# Altium PCB S28A模块化小车底板.pcbdoc (part 2 of 2)
Units mil, origin at the board's own origin, x right, y up, seen from the top; angles counter-clockwise.
Board outline 5579.41 x 4352.55 mil, 2 copper layers (Top Layer, Bottom Layer); 38 components, 47 nets, 158 pads, 338 vias.
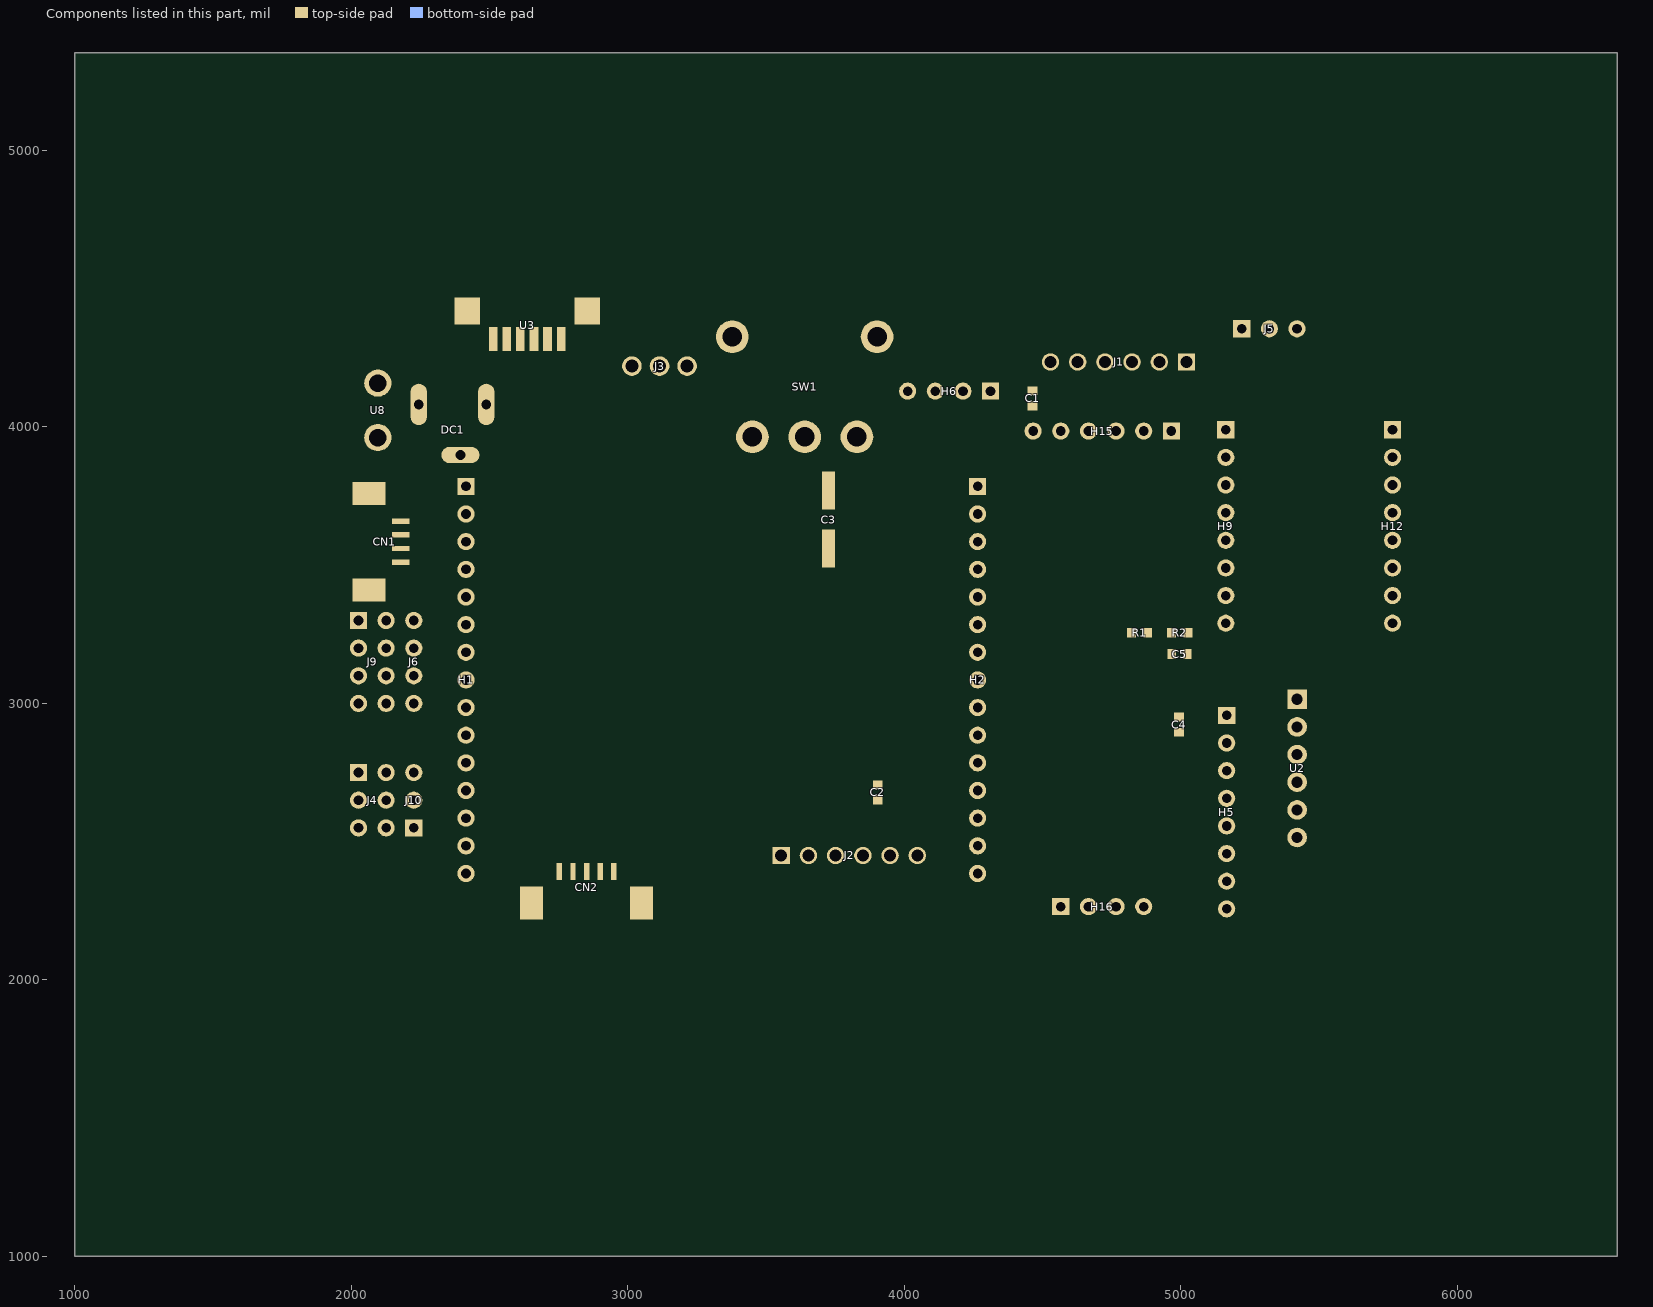
[diagram p2: the components of this part, seen from the top]

## Silkscreen, mask and mechanical layers (free items; w line width, h text height)
Top Overlay:
  lines w10 net PA6: 4026.54,2778.93 4096.54,2708.93 4161.54,2708.93 4181.54,2688.93 4181.54,2573.93 4196.54,2558.93
  lines w10 net S$112028: 2556.54,4162.55 2556.54,4258.93
  lines w10 net S$113267: 2511.54,4262.55 2781.54,4262.55
  lines w10 net S$14509: 5226.54,4028.93 5376.14,4028.93 ; 5376.54,4023.93 ccw(c5447.61,4008.7) 5519.21,4021.18 ; 5521.54,4028.93 5705.54,4028.93
  lines w10 net S$14513: 5226.54,3233.53 5226.54,4028.93 ; 5226.54,3238.93 5226.54,3233.93 5706.54,3233.93 5706.54,4030.53
  lines w10 net S$157343: 4026.54,2778.93 4026.54,2933.93
  lines w10 net S$232476: 2556.54,4162.55 2591.54,4127.55 2886.54,4127.55
  text "ON" at 3346.54,4402.12 h70.87
  text "OFF" at 3761.54,4402.12 h70.87
  text "PA24" at 4170.79,4362.55 h47.24 r270
  text "GND" at 3965.79,4314.05 h47.24 r270
  text "PA9" at 4070.79,4314.05 h47.24 r270
  text "5V" at 4270.79,4271.95 h47.24 r270
  text "GND" at 5139.41,4218.93 h47.24
  text "5V" at 5284.41,4218.93 h47.24
  text "PA8" at 5381.54,4218.93 h47.24
  text "AO2" at 4487.92,4187.55 h47.24 r270
  text "GND" at 4872.92,4182.55 h47.24 r270
  text "3V3" at 4577.92,4177.55 h47.24 r270
  text "A26" at 4682.92,4177.55 h47.24 r270
  text "A25" at 4782.92,4177.55 h47.24 r270
  text "AO1" at 4972.92,4177.55 h47.24 r270
  text "GND" at 2977.92,4167.55 h47.24 r270
  text "3V3" at 3077.92,4167.55 h47.24 r270
  text "PA22" at 3172.92,4157.55 h47.24 r270
  text "+" at 2346.34,4138.73 h98.42 r135
  text "3V3" at 2776.85,4112.55 h39.37 r270
  text "GND" at 2826.85,4112.55 h39.37 r270
  text "PB17" at 2566.85,4107.55 h39.37 r270
  text "PB16" at 2621.85,4107.55 h39.37 r270
  text "PA12" at 2676.85,4107.55 h39.37 r270
  text "PA27" at 2726.85,4107.55 h39.37 r270
  text "-" at 2360.75,3943.93 h98.42 r90
  text "PB2" at 5570.82,3942.55 h47.24
  text "VM" at 5246.54,3935.31 h47.24
  text "12V" at 4422.92,3923.93 h47.24 r270
  text "12V" at 4522.92,3923.93 h47.24 r270
  text "12V" at 4617.92,3923.93 h47.24 r270
  text "GND" at 4717.92,3918.93 h47.24 r270
  text "GND" at 4817.92,3918.93 h47.24 r270
  text "GND" at 4917.92,3918.93 h47.24 r270
  text "PA13" at 5541.62,3838.93 h47.24
  text "VCC" at 5241.54,3830.31 h47.24
  text "3V3" at 4095.81,3747.86 h39.37
  text "5V" at 2496.54,3744.24 h39.37
  text "GND" at 5241.54,3735.31 h47.24
  text "PA14" at 5539.41,3733.93 h47.24
  text "GND" at 4097.61,3647.86 h39.37
  text "GND" at 2481.54,3644.24 h39.37
  text "5V" at 5610.72,3638.93 h47.24
  text "AO1" at 5241.54,3635.31 h47.24
  text "NC" at 2226.54,3628.18 h31.5
  text "GND" at 2226.54,3573.18 h31.5
  text "PA7" at 4095.81,3547.86 h39.37
  text "PA25" at 2481.54,3544.24 h39.37
  text "PA16" at 5543.72,3543.93 h47.24
  text "AO2" at 5241.54,3535.31 h47.24
  text "A24" at 2226.54,3528.18 h31.5
  text "5V" at 2226.54,3478.18 h31.5
  text "PB2" at 4099.41,3442.86 h39.37
  text "BO2" at 5246.54,3440.31 h47.24
  text "PA26" at 2481.54,3439.24 h39.37
  text "PA17" at 5541.62,3438.93 h47.24
  text "PB3" at 5570.81,3343.93 h47.24
  text "PB3" at 4099.41,3342.86 h39.37
  text "PA1" at 2481.54,3339.24 h39.37
  text "BO1" at 5246.54,3335.31 h47.24
  text "A9" at 2286.54,3261.21 h35.43
  text "PA17" at 4075.11,3247.86 h39.37
  text "GND" at 5568.62,3243.93 h47.24
  text "PA0" at 2481.54,3239.24 h39.37
  text "GND" at 5241.54,3235.31 h47.24
  text "A27" at 2261.88,3195.02 h35.43 r315
  text "PB17" at 2481.54,3144.24 h39.37
  text "PA16" at 4076.91,3142.86 h39.37
  text "A24" at 2266.88,3090.02 h35.43 r315
  text "PB16" at 2481.54,3044.24 h39.37
  text "PA14" at 4073.31,3042.86 h39.37
  text "A22" at 2261.88,2990.02 h35.43 r315
  text "NC" at 5259.41,2958.93 h47.24
  text "PA13" at 4075.11,2942.86 h39.37
  text "GNDx4" at 1992.76,2938.93 h27.56 r270
  text "3V3x4" at 2097.76,2938.93 h27.56 r270
  text "PA12" at 2481.54,2939.24 h39.37
  text "5V" at 5052.5,2921.8 h31.5
  text "PA22" at 3874.41,2882.86 h39.37
  text "PB6" at 5254.41,2863.93 h47.24
  text "PB7" at 4099.41,2847.86 h39.37
  text "PA8" at 2481.54,2839.24 h39.37
  text "PA15" at 3874.41,2827.86 h39.37
  text "GND" at 5024.41,2821.8 h31.5
  text "PB20" at 3874.41,2777.86 h39.37
  text "PB7" at 5259.41,2758.93 h47.24
  text "PB6" at 4101.21,2747.86 h39.37
  text "PA9" at 2481.54,2739.24 h39.37
  text "PB24" at 3874.41,2727.86 h39.37
  text "PA1" at 5035.88,2726.8 h31.5
  text "B17" at 2284.41,2709.83 h35.43
  text "GND" at 5254.41,2663.93 h47.24
  text "PA27" at 2481.54,2644.24 h39.37
  text "GND" at 3602.92,2623.93 h47.24 r270
  text "PA0" at 5022.99,2621.8 h31.5
  text "3V3" at 3900.79,2617.55 h47.24 r270
  text "BO1" at 3502.92,2613.93 h47.24 r270
  text "B20" at 3697.92,2613.93 h47.24 r270
  text "B24" at 3802.92,2613.93 h47.24 r270
  text "BO2" at 3997.92,2613.93 h47.24 r270
  text "B16" at 2284.41,2604.83 h35.43
  text "5V" at 5264.41,2563.93 h47.24
  text "PA22" at 2718.66,2553.52 h31.5 r270
  text "PA27" at 2820.79,2553.52 h31.5 r270
  text "PA24" at 2481.54,2544.24 h39.37
  text "NC" at 5053.9,2526.8 h31.5
  text "3V3" at 2865.79,2524.02 h31.5 r270
  text "PA9" at 2768.66,2522.55 h31.5 r270
  text "GND" at 2915.79,2522.62 h31.5 r270
  text "A12" at 2281.54,2506.21 h35.43
  text "GNDx3" at 1992.76,2483.93 h27.56 r270
  text "5Vx3" at 2097.76,2483.93 h27.56 r270
  text "GND" at 4722.92,2463.93 h47.24 r270
  text "GND" at 4817.92,2463.93 h47.24 r270
  text "NC" at 5269.41,2463.93 h47.24
  text "GND" at 2481.54,2444.24 h39.37
  text "NC" at 5053.9,2426.8 h31.5
  text "5V" at 4522.92,2423.93 h47.24 r270
  text "5V" at 4622.92,2423.93 h47.24 r270
  text "3V3" at 2481.54,2344.24 h39.37
  text "NC" at 5053.9,2321.8 h31.5
  text "PA7" at 5022.98,2221.8 h31.5
Bottom Overlay:
  text "+" at 2094.38,4231.09 h78.74 r45
  text "-" at 2061.54,3998.3 h78.74 r180